# EAGLE board FanSpeedController (EAGLE 9.7.0)

Size 328.24 x 151.45 mm. Coordinates in mm from the lower left corner, seen from the top.
Outline: 0,0 328.24,0 328.24,151.45 0,151.45 0,0
Copper layers (1*16): Top 0.035mm / dielectric 1.5mm / Bottom 0.035mm
Design rules "default": minimum track width 6mil, minimum drill 0.35mm, track to track 6mil, track to pad 6mil, pad to pad 6mil, via to via 6mil, smd to smd 6mil, copper to edge 40mil, drill to drill 6mil, minimum pad ring 10mil, minimum via ring 8mil, stop-mask expansion 4mil, vias tented up to drill 0mil, thermal gap 10mil

## Footprints (pad centres in the part's own frame; a part is rotated, then mirrored left to right if it is on the bottom)
BATTERY-GENERIC = drill 1.118 pad 3.15 octagon: + 2.54,0; - -2.54,0
CAPPRD254W65D500H1150B = drill 0.85 pad 1.45: 1 -1.27,0; 2 1.27,0
DIODE-AXIAL = drill 1: 1 -5.08,0; 2 5.08,0
LEDRD254W60D565H860B_B = drill 0.981 pad 1.581: 1 -1.27,0; 2 1.27,0
MOTOR = drill 1.118 pad 3.15 octagon: + 2.54,0; - -2.54,0
RESAD1016W63L850D250B = drill 0.83 pad 1.43: 1 -5.08,0; 2 5.08,0
TO92 = drill 0.813 octagon: 1 -1.27,0; 2 0,1.905; 3 1.27,0
ARDUINO-UNO-R3-SHIELD = drill 1.016 pad 1.88: 3.3V 24.13,-2.54; 5V 24.13,0; A0 24.13,12.7; A1 24.13,15.24; A2 24.13,17.78; A3 24.13,20.32; A4 24.13,22.86; A5 24.13,25.4; AREF -24.13,-13.97; D2 -24.13,20.32; D3 -24.13,17.78; D4 -24.13,15.24; D5 -24.13,12.7; D6 -24.13,10.16; D7 -24.13,7.62; D8 -24.13,3.81; D9 -24.13,1.27; D10 -24.13,-1.27; D11 -24.13,-3.81; D12 -24.13,-6.35; D13 -24.13,-8.89; GND@0 24.13,2.54; GND@1 24.13,5.08; GND@2 -24.13,-11.43; IOREF 24.13,-7.62; NC 24.13,-10.16; RES 24.13,-5.08; RX -24.13,25.4; SCL -24.13,-19.05; SDA -24.13,-16.51; TX -24.13,22.86; VIN 24.13,7.62
JHD-162A = drill 1.016 long: 1 -19.05,0; 2 -16.51,0; 3 -13.97,0; 4 -11.43,0; 5 -8.89,0; 6 -6.35,0; 7 -3.81,0; 8 -1.27,0; 9 1.27,0; 10 3.81,0; 11 6.35,0; 12 8.89,0; 13 11.43,0; 14 13.97,0; 15 16.51,0; 16 19.05,0

## Placement (x,y rotation side)
BAT1  9V  [BATTERY-GENERIC]  260.03,11.61 270 top
C1  1u  [CAPPRD254W65D500H1150B]  21.15,82.9 270 top
D1  DIODEDIODE-AXIAL  [DIODE-AXIAL]  6.33,23.29 270 top
D2  BLUE  [LEDRD254W60D565H860B_B]  314.87,143.54 180 top
M1  MOTOR_HDR  [MOTOR]  110.73,8.26 270 top
R1  1k  [RESAD1016W63L850D250B]  299.33,130.74 0 top
R2  1k  [RESAD1016W63L850D250B]  25.11,113.07 90 top
R3  150  [RESAD1016W63L850D250B]  213.41,80.77 90 top
R4  150  [RESAD1016W63L850D250B]  243.95,21.33 90 top
T1  NPN  [TO92]  39.43,41.77 90 top
U1  ARDUINO-UNO-R3-SHIELD  [ARDUINO-UNO-R3-SHIELD]  158.73,97.61 270 top
U2  TMP36GT9Z_TO92  [TO92]  96.34,129.45 0 top
U3  LCD-16X2JHD-162A  [JHD-162A]  272.62,105.53 0 top

## Library data of the parts
BAT1 C1 D1 M1 R1-R4 U1-U3 = Tinkercad
D2 = Tinkercad; CATEGORY: Opto-Electronic; SUB-CATEGORY: LED; VALUE: LED_BLUE
T1 = Tinkercad; CATEGORY: Transistor; SUB-CATEGORY: BJT; TYPE: NPN

## Nets
BAT1+: BAT1.+ R4.1
BAT1-: BAT1.- C1.2 D2.1 T1.3 U1.GND@0 U1.GND@1 U1.GND@2 U2.1 U3.1 U3.3 U3.5 U3.16
D2_C: D2.2 R1.2
M1_-: D1.1 M1.- T1.1
T1_B: C1.1 R2.1 T1.2
U1_3.3V: R3.1 U1.3.3V
U1_A0: U1.A0 U2.2
U1_D2: U1.D2 U3.4
U1_D3: U1.D3 U3.6
U1_D4: U1.D4 U3.11
U1_D5: U1.D5 U3.12
U1_D6: U1.D6 U3.13
U1_D7: U1.D7 U3.14
U1_D8: R1.1 U1.D8
U1_D11: R2.2 U1.D11
U1_VIN: D1.2 M1.+ R4.2 U1.VIN
U3_LED+: R3.2 U2.3 U3.2 U3.15

## Tracks (layer width: path | path; a pad name or v marks a point on that pad's centre or on a via)
BAT1+  (1 unrouted)
BAT1-  (11 unrouted)
D2_C  (1 unrouted)
M1_-  (2 unrouted)
T1_B  (2 unrouted)
U1_3.3V  (1 unrouted)
U1_A0  (1 unrouted)
U1_D2  (1 unrouted)
U1_D3  (1 unrouted)
U1_D4  (1 unrouted)
U1_D5  (1 unrouted)
U1_D6  (1 unrouted)
U1_D7  (1 unrouted)
U1_D8  (1 unrouted)
U1_D11  (1 unrouted)
U1_VIN  (3 unrouted)
U3_LED+  (3 unrouted)